# Altium PCB ESP32RobotBoard.PcbDoc
Units mm, origin at the board's own origin, x right, y up, seen from the top; angles counter-clockwise.
Board outline 64.99 x 56 mm, 2 copper layers (Top Layer, Bottom Layer), stack 1.554 mm thick; 31 components, 40 nets, 187 pads, 207 vias.
Unrouted connection lines stored in the file: 38.
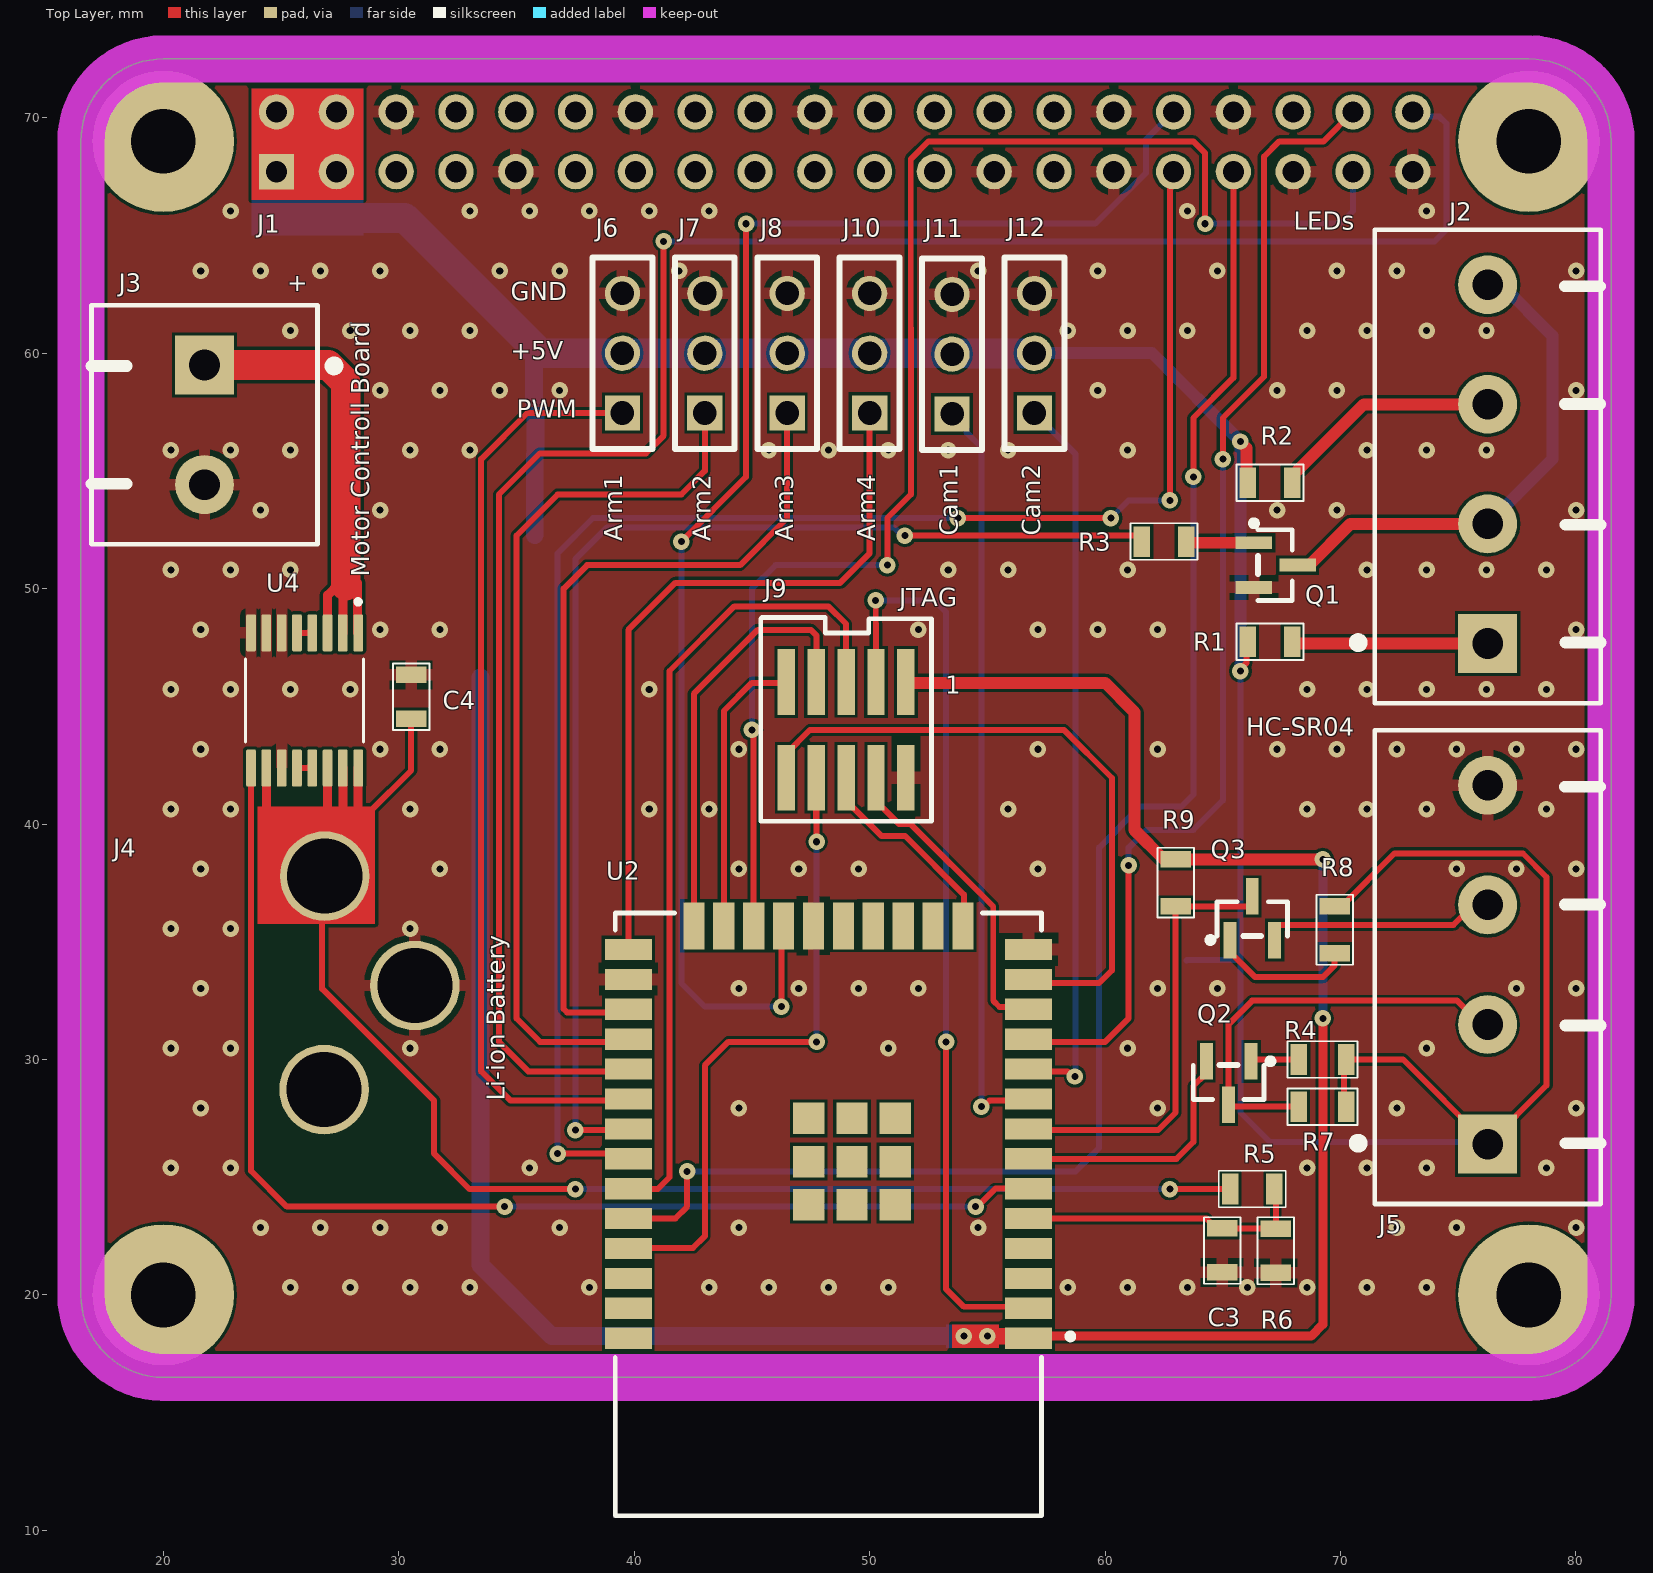
[diagram p0: Top Layer view]
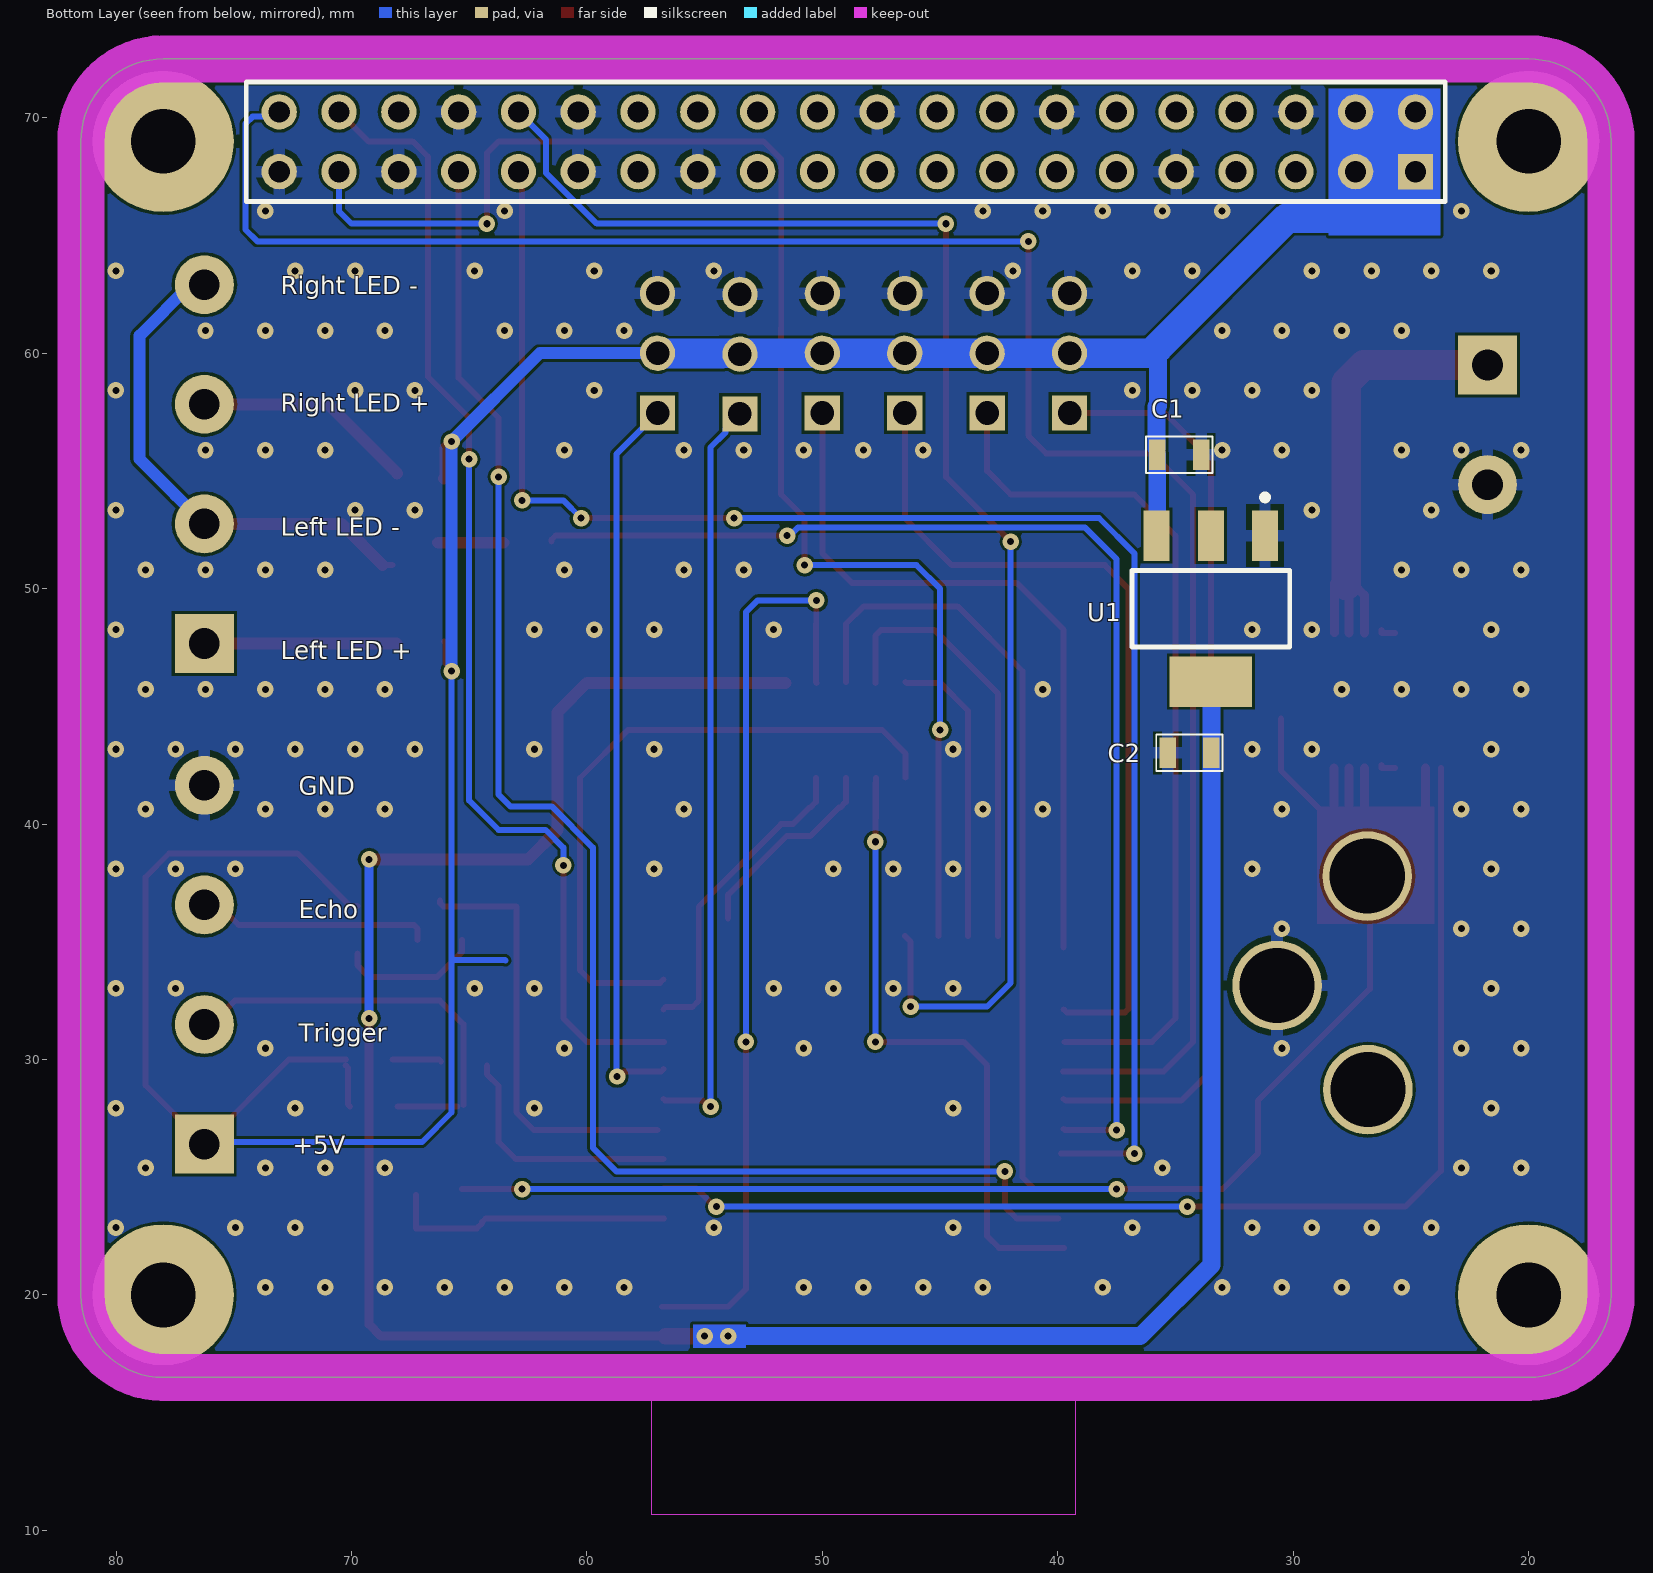
[diagram p1: Bottom Layer view, seen from below]

## Layer stack, top to bottom
Top Solder: solder mask 0.0203, Solder Resist, Dk 3.5
Top Layer: signal copper 0.0533
Dielectric 1: dielectric 1.4478, FR-4, Dk 4.6
Bottom Layer: signal copper 0.0533
Bottom Solder: solder mask 0.0203, Solder Resist, Dk 3.5

## Board outline
16.5,20 ccw(c20,20) 20,16.5 78,16.5 ccw(c77.996,19.996) 81.492,20 81.492,69 ccw(c77.996,69.004) 78,72.5 20,72.5 ccw(c20,69) 16.5,69

## Design rules (kind name [scope] priority, off if disabled: settings)
Clearance [All] p1: gap=0.127 ignorepadtopadclearanceinfootprint=FALSE except(0: Arc-Hole Track-Hole SMDPad-Hole THPad-Hole Via-Hole Fill-Hole Poly-Hole Region-Hole Text-Hole)
HoleSize [All] p1: absolutevalues=TRUE maxlimit=5.54 minlimit=0.025 maxpercent=80.000 minpercent=20.000
PolygonConnect [All] p1: connectstyle=Relief reliefconductorwidth=0.508 reliefentries=4 polygonreliefangle="90 Angle" airgapwidth=0.254
RoutingVias [All] p1: holewidth=0.3 width=0.7 viastyle="Through Hole" minholewidth=0.3 minwidth=0.635 maxholewidth=0.711 maxwidth=1.27
SolderMaskExpansion [All] p1: expansion=0.102 istentingtop=FALSE
Width [All] p1: maxlimit=1.27 minlimit=0.254 preferedwidth=0.254 minimp=50.000000 maximp=50.000000 favimp=50.000000
29 further rules are at their usual default settings.

## Components (designator, comment, footprint, x,y, rotation, side; value= is the part's Value field where it differs from the comment)
C1 "100n" C0805 34.75,55.717 r180 bottom
C2 "10u" C0805 34.5,43 r0 bottom
C3 "10n" C0805 65,21.802 r270 top
C4 "100n" C0805 30.5,45.5 r90 top
J1 "RPI GPIO Connector" rpi 48.94,68.98 r180 top
J2 "BUCHSEHN_1X4" MKDSN2,5/4-5,08 76.25,50.21 r90 top value="1X4 female"
J3 "2X1Molex" MKDSN2,5/2-5,08 21.75,56.96 r270 top value="CII 5.08/2"
J4 "CONN_DC10A" DC10A 26.75,33.5 r270 top value=DC10A
J5 "BUCHSEHN_1X4" MKDSN2,5/4-5,08 76.25,28.947 r90 top value="1X4 female"
J6 "BUCHSEHN_1X3" "HEADER_3X1 - male" 39.5,60 r90 top value="1X3 male"
J7 "BUCHSEHN_1X3" "HEADER_3X1 - male" 43,60 r90 top value="1X3 male"
J8 "BUCHSEHN_1X3" "HEADER_3X1 - male" 46.5,60 r90 top value="1X3 male"
J9 "esp-debug-connector" SAMTEC-FTS-105-01-X-DV 49,44 r180 top
J10 "BUCHSEHN_1X3" "HEADER_3X1 - male" 50,60 r90 top value="1X3 male"
J11 "BUCHSEHN_1X3" "HEADER_3X1 - male" 53.5,59.96 r90 top value="1X3 male"
J12 "BUCHSEHN_1X3" "HEADER_3X1 - male" 57,60 r90 top value="1X3 male"
Q1 "NPN" SOT23-3 67.25,51 r0 top
Q2 "BC847C_SOT23" SOT23-3 65.25,29 r270 top value=BC847C
Q3 "BC847C_SOT23" SOT23-3 66.25,36 r90 top value=BC847C
R1 "300R" R0805#1 67,47.75 r180 top
R2 "300R" R0805#1 67,54.5 r180 top
R3 "1k" R0805#1 62.5,52 r0 top
R4 "10k" R0805#2 69.25,30 r0 top
R5 "24k" R0805#1 66.25,24.5 r180 top
R6 "7k5" R0805#1 67.25,21.878 r90 top
R7 "10k" R0805#2 69.25,28 r0 top
R8 "10k" R0805#2 69.75,35.5 r270 top
R9 "10k" R0805#2 63,37.5 r270 top
U1 "LM1117" SOT223 31.2,52.25 r0 bottom value=LM1117-ADJ
U2 "ESP32-DEVKITC-32D" Espressif_Systems_ESP32-WROOM-32D_MFG 48.25,23.425 r180 top
U4 "INA250A3PW" TSSOP-16 26,45.25 r270 top

## Footprints (in the part's own frame and the unit in brackets; to place one, negate y for a bottom-side part, rotate by r counter-clockwise, add the part's x,y. Pads: shape width x height; smd on the part's side, far side on the other; paste and mask are expansions set on the pad)
C0805 [mm] "Chip Capacitor, Body 2.0x1.3mm, IPC High Density"
  rect 0.7x1.3 smd: 1(-1.025,-0.025) 2(0.838,-0.025)
  silkscreen extent -1.5,-0.8 1.32,0.75, body extent -1.1,-0.64 0.9,0.61, height 0.8
DC10A [mm] "DC power connector"
  round 3.8 hole 3.2: 1(-4.293,0.102) 2(0.356,3.937) 3(4.775,0.076)
  body extent -4.14,-10.01 5.16,4.39, height 11.01
Espressif_Systems_ESP32-WROOM-32D_MFG [mm]
  rect 2x0.9 smd paste+0 mask+0: 1(-8.5,5.26) 2(-8.5,3.99) 3(-8.5,2.72) 4(-8.5,1.45) 5(-8.5,0.18) 6(-8.5,-1.09) 7(-8.5,-2.36) 8(-8.5,-3.63) 9(-8.5,-4.9) 10(-8.5,-6.17) 11(-8.5,-7.44) 12(-8.5,-8.71) 13(-8.5,-9.98) 14(-8.5,-11.25) 25(8.5,-11.25) 26(8.5,-9.98) 27(8.5,-8.71) 28(8.5,-7.44) 29(8.5,-6.17) 30(8.5,-4.9) 31(8.5,-3.63) 32(8.5,-2.36) 33(8.5,-1.09) 34(8.5,0.18) 35(8.5,1.45) 36(8.5,2.72) 37(8.5,3.99) 38(8.5,5.26)
  rect 0.9x2 smd paste+0 mask+0: 15(-5.715,-12.25) 16(-4.445,-12.25) 17(-3.175,-12.25) 18(-1.905,-12.25) 19(-0.635,-12.25) 20(0.635,-12.25) 21(1.905,-12.25) 22(3.175,-12.25) 23(4.445,-12.25) 24(5.715,-12.25)
  rect 1.33x1.33 smd paste+0 mask+0: 39(-2.835,-0.405) 39(-2.835,-4.075) 39(-2.835,-2.24) 39(-1,-0.405) 39(-1,-2.24) 39(-1,-4.075) 39(0.835,-0.405) 39(0.835,-2.24) 39(0.835,-4.075)
  Keep-Out Layer region: -9,6.45 9,6.45 9,12.75 -9,12.75
  Keep-Out Layer region: -9,6.45 9,6.45 9,12.75 -9,12.75
  silkscreen extent -10.4,-12.8 9.05,12.8, body extent -9.6,-13.35 9.6,12.9, height 0.25
"HEADER_3X1 - male" [mm] "MOLEX_male"
  rect 1.5x1.5 hole 1: 1(-2.54,0)
  round 1.5 hole 1: 2(0,0) 3(2.54,0)
  silkscreen extent -4.06,-1.27 4.06,1.27, body extent -4.06,-1.17 4.06,1.18, height 9.5
MKDSN2,5/2-5,08 [mm] "2-pole 5.08mm pitch Terminal Block"
  rect 2.5x2.5 hole 1.3: 1(-2.54,0)
  round 2.5 hole 1.3: 2(2.54,0)
  silkscreen extent -5.08,-4.8 5.08,5.7, body extent -5.62,-4.72 5.11,4.78, height 15
MKDSN2,5/4-5,08 [mm] "2-pole 5.08mm pitch Terminal Block"
  rect 2.5x2.5 hole 1.3: 1(-2.54,0)
  round 2.5 hole 1.3: 2(2.54,0) 3(7.62,0) 4(12.7,0)
  silkscreen extent -5.08,-4.8 15.04,5.7, body extent -5.64,-4.8 15.17,4.72, height 15
R0805#1 [mm] "Chip Resistor, Body 2.0x1.2mm, IPC Medium Density"
  rect 0.7x1.3 smd: 1(-0.94,0) 2(0.94,0)
  silkscreen extent -1.42,-0.77 1.42,0.77, body extent -1,-0.62 1,0.63, height 0.5
R0805#2 [mm] "Chip Resistor, Body 2.0x1.2mm, IPC Medium Density"
  rect 0.7x1.3 smd: 1(-1.016,0) 2(0.991,0)
  silkscreen extent -1.5,-0.77 1.47,0.77, body extent -1,-0.62 1,0.63, height 0.5
rpi [mm]
  rect 1.5x1.5 hole 0.9: 1(24.13,1.27)
  round 1.5 hole 0.9: 2(24.13,-1.27) 3(21.59,1.27) 4(21.59,-1.27) 5(19.05,1.27) 6(19.05,-1.27) 7(16.51,1.27) 8(16.51,-1.27) 9(13.97,1.27) 10(13.97,-1.27) 11(11.43,1.27) 12(11.43,-1.27) 13(8.89,1.27) 14(8.89,-1.27) 15(6.35,1.27) 16(6.35,-1.27) 17(3.81,1.27) 18(3.81,-1.27) 19(1.27,1.27) 20(1.27,-1.27) 21(-1.27,1.27) 22(-1.27,-1.27) 23(-3.81,1.27) 24(-3.81,-1.27) 25(-6.35,1.27) 26(-6.35,-1.27) 27(-8.89,1.27) 28(-8.89,-1.27) 29(-11.43,1.27) 30(-11.43,-1.27) 31(-13.97,1.27) 32(-13.97,-1.27) 33(-16.51,1.27) 34(-16.51,-1.27) 35(-19.05,1.27) 36(-19.05,-1.27) 37(-21.59,1.27) 38(-21.59,-1.27) 39(-24.13,1.27) 40(-24.13,-1.27)
  body extent -25.52,-2.63 25.53,2.38, height 8.5
SAMTEC-FTS-105-01-X-DV [mm]
  rect 0.74x2.79 smd mask+0: 1(-2.54,-2.032) 2(-2.54,2.032) 3(-1.27,-2.032) 4(-1.27,2.032) 5(0,-2.032) 6(0,2.032) 7(1.27,-2.032) 8(1.27,2.032) 9(2.54,-2.032) 10(2.54,2.032)
  silkscreen extent -3.62,-4.78 3.62,3.88, body extent -3.18,-2.92 3.17,2.92, height 4.33
SOT23-3 [mm] "SOT23, 3-Leads, Body 3.0x2.6mm (max), Pitch 0.95mm, IPC Medium Density"
  rect 1.55x0.55 smd: 1(-0.925,0.95) 2(-0.925,-0.95) 3(0.925,0)
  silkscreen extent -1.05,-1.5 0.7,1.9, body extent -1.53,-1.5 1.47,1.5, height 1.3
SOT223 [mm] "SOT-223/SC-73; 4 Leads; Body 6.7 x 7.3 mm, inc. leads (LxW max)"
  rect 1.1x2.15 smd: 1(0,0) 2(2.3,0) 3(4.6,0)
  rect 3.5x2.15 smd: 4(2.3,6.2)
  silkscreen extent -1.05,-1.75 5.65,4.72, body extent -0.94,-0.53 5.56,6.47, height 1.7
TSSOP-16 [mm]
  rrect25% 1.57x0.41 smd: 1(-2.87,2.275) 2(-2.87,1.625) 3(-2.87,0.975) 4(-2.87,0.325) 5(-2.87,-0.325) 6(-2.87,-0.975) 7(-2.87,-1.625) 8(-2.87,-2.275) 9(2.87,-2.275) 10(2.87,-1.625) 11(2.87,-0.975) 12(2.87,-0.325) 13(2.87,0.325) 14(2.87,0.975) 15(2.87,1.625) 16(2.87,2.275)
  silkscreen extent -4.29,-2.5 1.77,2.5, body extent -3.15,-2.5 3.25,2.5, height 1.06

## Part data
C1 C4: library part Cap100n_50V_0805, "Ceramic Chip Capacitor 0805 size", Manufacturer="NIC COMPONENTS", Package=0805, Voltage=50V, Distributor=RET, OrderCode=93-02-37, Price=4
C2: library part Cap10u_10V_0805, "Ceramic Chip Capacitor 0805 size", Manufacturer=NIC, Package=0805, Voltage=10V, Distributor=RET, OrderCode=93-04-42, Price=9
C3: library part Cap10n_50V_0805, "Ceramic Chip Capacitor 0805 size", Manufacturer="NIC COMPONENTS", Package=0805, Voltage=50V, Distributor=RET, OrderCode=93-02-32, Price=4
J1: library part "rpi connector", "GPIO Header for Raspberry Pi A+/B+/Pi 2/Pi 3 - 2x20", Manufacturer="SparkFun Electronics", Manufacturer Part Number=PRT-14017, Supplier Part Number 1=1568-1462-ND, Accessory Type=Connector, Category="Development Boards, Kits, Programmers", ComponentLink1Description=https://cdn.sparkfun.com/datasheets/Dev/RaspberryPi/12313.pdf, ComponentLink1URL=https://cdn.sparkfun.com/datasheets/Dev/RaspberryPi/12313.pdf, For Use With/Related Products="Raspberry Pi", Nils Minor=author, nilsminor@web.de=mail, Part Status=Active, Pricing 1="1=1.84 (EUR)", RoHS="RoHS Compliant", Stock 1=150, Supplier 1=Digi-Key
J2 J5: "1X4_HEADER", Manufacturer=E-TEC, Distributor=RET, OrderCode=53-19-93, Price=82
J3: Manufacturer=STELVIO, Distributor=RET, OrderCode=53-08-03, Price=64
J4: "DC 10A connector", Manufacturer=CLIFF, Distributor=RET, OrderCode=53-10-45, Price=200
J6 J7 J8 J10 J11 J12: "1X3_HEADER", Manufacturer=E-TEC, Distributor=RET, OrderCode=53-00-05, Price=82
J9: Part number=53-04-57, Price=1000
Q1: "NPN small-signal 100mA 45V 250mW SOT-23", Manufacturer="ON Semi", PartNumber=BC847B, Serpa=032-00169
Q2 Q3: "NPN Bipolar transistor 100mA 45V UCE", Manufacturer=NXP, Package=SOT23, Distributor=RET, OrderCode=44-01-75
R1 R2: library part Res300R_125mW_0805, "Chip Resistor Thick Film", Manufacturer=YAGEO, Package=0805, Power=125mW, Distributor=RET, OrderCode=96-01-94, Price=1,8
R3: library part Res1k_125mW_0805, "Chip Resistor Thick Film", Manufacturer=YAGEO, Package=0805, Power=125mW, Distributor=RET, OrderCode=96-02-06, Price=2
R4 R7 R8 R9: library part Res10k_125mW_0805, "Chip Resistor Thick Film", Manufacturer=YAGEO, Package=0805, Power=125mW, Distributor=RET, OrderCode=96-02-32, Price=1,8
R5: library part Res24k_125mW_0805, "Chip Resistor Thick Film", Manufacturer=YAGEO, Package=0805, Power=125mW, Distributor=RET, OrderCode=96-02-34, Price=2
R6: library part Res7k5_125mW_0805, "Chip Resistor Thick Film", Manufacturer=YAGEO, Package=0805, Power=125mW, Distributor=RET, OrderCode=96-02-56, Price=1,8
U1: library part LM1117-ADJ, "15V 800mA adjustable LDO SOT-223", Manufacturer="National Semiconductor", Package=SOT223, Distributor=RET, OrderCode=76-00-51, Price=320
U2: "EVAL BOARD FOR ESP-WROOM-32", Package=None, Availability=Warning, Check_prices=https://www.snapeda.com/parts/ESP32-DEVKITC-32D/Espressif%20Systems/view-part/2777395/?ref=eda, MF="Espressif Systems", MP=ESP32-DEVKITC-32D, Price=None, Purchase-URL=https://pricing.snapeda.com/search/part/ESP32-DEVKITC-32D/?ref=eda, SnapEDA_Link=https://www.snapeda.com/parts/ESP32-DEVKITC-32D/Espressif%20Systems/view-part/2777395/?ref=snap
U4: "36V, bi-directional, precision current sense amplifier w/int. shunt resistor 16-TSSOP -40 to 125", Package="TSSOP-16 Texas Instruments", Availability=Warning, MF="Texas Instruments", Mouser-Purchase-URL=https://snapeda.com/shop?store=Mouser&id=835597, MP=INA250A3PW, Price=None, SnapEDA_Link=https://www.snapeda.com/parts/INA250A3PW/Texas%20Instruments/view-part/835597/?ref=snap, Texas_Instruments-Purchase-URL=https://snapeda.com/shop?store=Texas+Instruments&id=835597

## Free pads (board coordinates)
  round 6 hole 2.75: ""(20,20) ""(20,69) ""(78,20) ""(78,69)

## Via types
v1: diameter 0.7, hole 0.3, Top Layer to Bottom Layer, tented both sides, 206 vias
v2: diameter 0.7/0.7 (per signal layer), hole 0.3, Top Layer to Bottom Layer, tented both sides, 1 vias

## Nets (pads, with @x,y where several pads share a name; then routed paths per layer and width w, separated by ;. In a path a pad name is that pad's centre, name@x,y a point inside that pad or via, vN(x,y) a via of type N, cw(c..) or ccw(c..) an arc to the next point about the centre after c; other vN are vias at no path point)
+3V3: C2.1 J9.1 R9.1 U1.2 U1.4 U2.1 | length 105.7
  Top Layer w0.254: J9.1 J9.1@51.572,46 ; v1(54,18.25) v1(55,18.25) ; U2.1@56.665,18.25 U2.1
  Top Layer w0.381: U2.1@56.781,18.25 68.75,18.25 69.25,18.75 v1(69.25,31.75)
  Top Layer w0.508: J9.1@51.572,46 60,46 61.25,44.75 61.25,39.75 62.5,38.5 v2(69.25,38.5)
  Top Layer w0.712: v1(55,18.25) U2.1@56.665,18.25
  Bottom Layer w0.381: v1(69.25,31.75) v2(69.25,38.5)
  Bottom Layer w0.762: U1.4@33.475,46.225 C2.1 33.475,21.275 36.5,18.25 v1(54,18.25)
+5V: C1.1 J1.1 J1.2 J1.3 J1.4 J5.1 J6.2 J7.2 J8.2 J10.2 J11.2 J12.2 R1.2 R2.2 R4.2 R7.2 R8.1 U1.3 | length 131.4
  Top Layer w0.254: v1(65.75,46.5) 65.75,46.589 66,46.839 66,47.69 R1.2 ; R8.1 70.05,36.516 72.284,38.75 77.75,38.75 78.75,37.75 78.75,28.907 J5.1 J5.1@76.25,26.25 ; R7.2@70.057,28 70.149,28.092 70.149,29.649 R4.2@70.25,29.75 ; R4.2 72.657,30 76.157,26.5 J5.1@76.25,26.5
  Top Layer w0.508: v1(65.75,56.25) 65.75,56.216 66,55.966 66,54.75 R2.2@66.063,54.687
  Bottom Layer w0.254: 26.25,66.5 27,66.5 ; 35.75,57.75 35.775,57.725 ; U1.3@35.775,52.275 U1.3 ; 54.25,60 54.27,59.98 ; 63.454,34.204 63.475,34.225 65.725,34.225 65.75,34.25 ; v1(65.75,46.5) 65.75,34.25 ; J5.1@76.25,26.5 67,26.5 65.75,27.75 65.75,34.25
  Bottom Layer w0.508: J12.2@57.651,60 62,60 v1(65.75,56.25) v1(65.75,46.5)
  Bottom Layer w0.762: 35.75,57.75 35.75,60.25 ; U1.3@35.775,52.275 C1.1 ; C1.1@35.806,55.961 35.806,57.728
  Bottom Layer w1.27: 26.125,68.25 27.414,66.961 27.414,66.201 27.865,65.75 30.25,65.75 35.75,60.25 36,60 43.644,60 43.75,60 54.25,60 ; J1.3@26.924,67.824 J1.3@27.194,67.554 ; J1.3@27.35,68.25 27.725,68.25 J1.3@27.725,67.554 ; 54.27,59.98 J12.2@57,59.98
+12.6V_VIN: C4.1 J4.1 R5.2 U4.10 U4.14 U4.15 U4.16 | length 64.4
  Top Layer w0.254: 24.375,40.625 24.5,40.5 24.5,40.25 ; J4.1@26.75,37.75 26.75,33 31.5,28.25 31.5,26 33,24.5 v1(37.5,24.5) ; J4.1@27,38.75 26.975,38.775 26.975,39.525 J4.1@27,39.5 ; J4.1@27.5,38.75 J4.1@27.625,38.875 ; U4.15 U4.15@27.703,42.302 ; 28.25,40.25 28.275,40.275 ; 28.75,40.5 30.525,42.275 C4.1 ; v1@63,24.5 R5.2
  Top Layer w0.381: 24.375,40.625 U4.10 ; J4.1@26.975,39.525 U4.14 ; J4.1@27.625,38.875 U4.15 ; 28.275,40.275 U4.16
  Bottom Layer w0.254: v1(37.5,24.5) 53.354,24.5 v1(62.75,24.5)
+12.6V_VOUT: J3.1 U4.1 U4.2 U4.3 | length 21
  Top Layer w0.254: 27.625,49.875 27.75,50 ; U4.1@28.25,48.145 U4.1
  Top Layer w0.381: U4.3 26.975,49.725 27.25,50 ; U4.2 27.625,49.875 ; U4.1@28.25,48.145 28.25,50.25
  Top Layer w1.27: J3.1 27.006,59.5 27.75,58.756 27.75,50.125
ArmPWM1: J6.1 U2.30 | length 39.6
  Top Layer w0.254: J6.1 35.46,57.46 33.5,55.5 33.5,29.5 34.75,28.25 39.675,28.25 U2.30
ArmPWM2: J7.1 U2.28 | length 37.2
  Top Layer w0.254: U2.28@39.723,30.75 36,30.75 35,31.75 35,52.25 36.75,54 42,54 43,55 J7.1
ArmPWM3: J8.1 U2.27 | length 35.9
  Top Layer w0.254: U2.27 39.615,32 37.149,32 37,32.149 37,50 38,51 44.5,51 46.5,53 J8.1
ArmPWM4: J10.1 U2.25 | length 31.1
  Top Layer w0.254: U2.25@39.75,34.75 39.75,48.25 41.75,50.25 48.75,50.25 50,51.5 J10.1@50,57.5
BattCurrent: U2.6 U4.9 | length 51
  Top Layer w0.254: U4.9 23.725,25.275 25.25,23.75 v1(34.5,23.75) ; v1(54.5,23.75) 54.572,23.75 54.786,23.964 ; 54.822,24 55.337,24.515 U2.6
  Bottom Layer w0.254: v1(34.5,23.75) v1(54.5,23.75)
BattVoltage: C3.1 R5.1 R6.2 U2.5 | length 12.1
  Top Layer w0.254: U2.5@56.719,23.25 64.303,23.25 64.452,23.101 64.452,23.05 64.675,22.827 C3.1 64.979,22.822 R6.2@67.178,22.822 ; R6.2 R5.1@67.25,24.25
CamPWM1: J11.1 U2.9 | length 32
  Top Layer w0.254: v1(54.75,28) 54.839,28 55.089,28.25 56.675,28.25 U2.9
  Bottom Layer w0.254: J11.1@53.5,57.25 53.67,57.25 54.123,56.797 54.123,56.627 54.75,56 v1(54.75,28)
CamPWM2: J12.1 U2.10 | length 30.7
  Top Layer w0.254: U2.10 56.845,29.5 58.397,29.5 58.618,29.279 v1(58.721,29.279)
  Bottom Layer w0.254: J12.1@57.25,57.21 58.75,55.71 58.75,29.308 v1(58.721,29.279)
Echo: Q3.3 R9.2 U2.8 | length 18.5
  Top Layer w0.254: U2.8@57,27 62.25,27 63,27.75 R9.2 66.102,36.509 66.25,36.657 Q3.3@66.25,36.75
EN: J9.3 U2.2 | length 41.8
  Top Layer w0.254: J9.3@50.25,46 50.26,46.01 50.26,49.49 v1(50.25,49.5) ; J9.3 50.27,48.52 ; v1(53.25,30.75) 53.25,20.25 54,19.5 U2.2@56.807,19.5
  Bottom Layer w0.254: v1(50.25,49.5) 52.75,49.5 53.25,49 v1(53.25,30.75)
GND: C1.2 C2.2 C3.2 C4.2 J1.6 J1.9 J1.14 J1.20 J1.25 J1.29 J1.30 J1.34 J1.35 J1.39 J3.2 J4.2 J5.4 J6.3 J7.3 J8.3 J9.2 J10.3 J11.3 J12.3 Q1.2 R6.1 U1.1 U2.14 U2.20 U2.26 U4.6 U4.7 U4.8 U4.11
  other v1: 25.4,20.32 27.94,20.32 30.48,20.32 33.02,20.32 38.1,20.32 43.18,20.32 45.72,20.32 48.26,20.32 50.8,20.32 58.42,20.32 60.96,20.32 63.5,20.32 66.04,20.32 68.58,20.32 71.12,20.32 73.66,20.32 24.13,22.86 26.67,22.86 29.21,22.86 31.75,22.86 36.83,22.86 44.45,22.86 54.61,22.86 72.39,22.86 74.93,22.86 80.01,22.86 20.32,25.4 22.86,25.4 35.56,25.4 68.58,25.4 71.12,25.4 73.66,25.4 78.74,25.4 21.59,27.94 44.45,27.94 62.23,27.94 72.39,27.94 80.01,27.94 20.32,30.48 22.86,30.48 30.48,30.48 50.8,30.48 60.96,30.48 73.66,30.48 21.59,33.02 44.45,33.02 46.99,33.02 49.53,33.02 52.07,33.02 62.23,33.02 64.77,33.02 77.47,33.02 80.01,33.02 20.32,35.56 22.86,35.56 30.48,35.56 21.59,38.1 31.75,38.1 44.45,38.1 46.99,38.1 49.53,38.1 57.15,38.1 74.93,38.1 77.47,38.1 80.01,38.1 20.32,40.64 22.86,40.64 30.48,40.64 40.64,40.64 43.18,40.64 55.88,40.64 68.58,40.64 71.12,40.64 73.66,40.64 78.74,40.64 21.59,43.18 29.21,43.18 31.75,43.18 44.45,43.18 57.15,43.18 62.23,43.18 67.31,43.18 69.85,43.18 72.39,43.18 74.93,43.18 77.47,43.18 80.01,43.18 20.32,45.72 22.86,45.72 25.4,45.72 27.94,45.72 40.64,45.72 68.58,45.72 71.12,45.72 73.66,45.72 76.2,45.72 78.74,45.72 21.59,48.26 29.21,48.26 31.75,48.26 52.07,48.26 57.15,48.26 59.69,48.26 62.23,48.26 80.01,48.26 20.32,50.8 22.86,50.8 25.4,50.8 53.34,50.8 55.88,50.8 60.96,50.8 71.12,50.8 73.66,50.8 76.2,50.8 78.74,50.8 24.13,53.34 29.21,53.34 67.31,53.34 69.85,53.34 80.01,53.34 20.32,55.88 22.86,55.88 25.4,55.88 30.48,55.88 33.02,55.88 45.72,55.88 48.26,55.88 50.8,55.88 53.34,55.88 55.88,55.88 60.96,55.88 71.12,55.88 73.66,55.88 76.2,55.88 29.21,58.42 31.75,58.42 34.29,58.42 36.83,58.42 59.69,58.42 67.31,58.42 69.85,58.42 80.01,58.42 25.4,60.96 27.94,60.96 30.48,60.96 33.02,60.96 58.42,60.96 60.96,60.96 63.5,60.96 68.58,60.96 71.12,60.96 73.66,60.96 76.2,60.96 21.59,63.5 24.13,63.5 26.67,63.5 29.21,63.5 34.29,63.5 36.83,63.5 41.91,63.5 54.61,63.5 59.69,63.5 64.77,63.5 69.85,63.5 72.39,63.5 80.01,63.5 22.86,66.04 33.02,66.04 35.56,66.04 38.1,66.04 40.64,66.04 43.18,66.04 63.5,66.04 73.66,66.04
IN1: J1.38 U2.11 | length 49.4
  Top Layer w0.254: U2.11@56.723,30.75 60,30.75 61,31.75 v1(61,38.25) ; v1(65,55.5) 65,57.25 66.75,59 66.75,68.351 67.399,69 69.28,69 J1.38
  Bottom Layer w0.254: v1(61,38.25) 61,39 61.75,39.75 63.75,39.75 65,41 v1(65,55.5)
IN2: J1.40 U2.29 | length 85.1
  Top Layer w0.254: U2.29@39.771,29.5 35.5,29.5 34.25,30.75 34.25,54 36,55.75 40.5,55.75 41.25,56.5 v1(41.25,64.75) ; J1.40@73,70.25 J1.40@73,70.32
  Bottom Layer w0.254: v1(41.25,64.75) 74,64.75 74.5,65.25 74.5,69.75 74.201,70.049 73.451,70.049 J1.40@73.25,70.25
IN3: J1.31 U2.32 | length 69.6
  Top Layer w0.254: v1(36.75,26) U2.32@39.866,26 ; v1(53.75,53) v1(60.25,53) ; v1(62.75,53.75) 62.75,67.55 J1.31
  Bottom Layer w0.254: v1(36.75,26) 36.75,51.5 38.25,53 v1(53.75,53) ; v1(60.25,53) 61,53.75 v1(62.75,53.75)
IN4: J1.33 U2.34 | length 66.8
  Top Layer w0.254: U2.34@39.96,23.25 41.75,23.25 42.25,23.75 v1(42.25,25.25) ; v1(63.75,54.75) 63.75,57.25 65.45,58.95 J1.33
  Bottom Layer w0.254: v1(42.25,25.25) 58.75,25.25 59.75,26.25 59.75,39 61.5,40.75 63.25,40.75 63.75,41.25 v1(63.75,54.75)
IOD: J9.5 U2.33 | length 34.8
  Top Layer w0.254: U2.33@39.836,24.5 41,24.5 41.5,25 41.5,46.5 44.25,49.25 48.25,49.25 49,48.5 J9.5
LEDPWM: R3.1 U2.31 | length 51.4
  Top Layer w0.254: v1(37.5,27) 39.695,27 U2.31 ; v1(51.5,52.25) 61.337,52.25 61.5,52.087 R3.1@61.5,52
  Bottom Layer w0.254: v1(37.5,27) 37.5,51.25 38.854,52.604 51.025,52.604 51.379,52.25 v1(51.5,52.25)
NetJ2_1: J2.1 R1.1 | length 8.3
  Top Layer w0.254: R1.1@68,47.75 R1.1@68.08,47.67
  Top Layer w0.508: R1.1@68.08,47.67 J2.1
NetJ2_2: J2.2 J2.4 Q1.3 | length 21.9
  Top Layer w0.254: Q1.3@68.25,51 Q1.3@68.675,51 ; J2.4@76,63 J2.4@76.25,62.75
  Top Layer w0.508: Q1.3@68.675,51 70.425,52.75 J2.2
  Bottom Layer w0.254: J2.4 J2.4@76.84,62.91
  Bottom Layer w0.508: J2.2 77.465,53.965 79,55.5 79,60.75 J2.4@76.84,62.91
NetJ2_3: J2.3 R2.1 | length 9.4
  Top Layer w0.254: J2.3@75.58,57.83 J2.3
  Top Layer w0.508: R2.1@68.059,54.896 70.993,57.83 J2.3@75.58,57.83
NetJ5_2: J5.2 Q2.3 R7.1 | length 17.8
  Top Layer w0.254: Q2.3 65.25,31.5 66.25,32.5 74.956,32.5 75.956,31.5 J5.2@76.25,31.5 ; Q2.3@65.5,28 R7.1@68.05,28
NetJ5_3: J5.3 Q3.2 | length 10.1
  Top Layer w0.254: Q3.2 67.2,35.575 67.348,35.723 74.798,35.723 75.825,36.75 J5.3@76.25,36.75 ; J5.3@76.183,36.5 J5.3
NetQ1_1: Q1.1 R3.2 | length 2.8
  Top Layer w0.254: R3.2@63.5,52 R3.2@63.55,51.95
  Top Layer w0.508: R3.2@63.55,51.95 Q1.1
NetQ2_1: Q2.1 R4.1 | length 2.1
  Top Layer w0.254: Q2.1 66.275,30 R4.1 R4.1@68.25,30
NetQ3_1: Q3.1 R8.2 | length 6.1
  Top Layer w0.254: Q3.1 65.3,34.575 66.375,33.5 69.25,33.5 69.75,34 R8.2@69.75,34.5
NetU4_4: U4.4 U4.5 | length 0.7
  Top Layer w0.254: U4.5 26.247,48.12 26.25,48.123 U4.4@26.25,48.25
NetU4_12: U4.12 U4.13 | length 0.7
  Top Layer w0.254: U4.12 26.247,42.38 26.25,42.383 U4.13@26.25,42.5
PWMA: J1.37 U2.22 | length 62.8
  Top Layer w0.254: v1(45,44) 45.075,43.925 U2.22@45.075,35.25 ; v1(50.75,51) 50.75,53 51.75,54 51.75,61.061 51.746,61.065 51.746,68.246 52.5,69 63.75,69 64.25,68.5 v1(64.25,65.5)
  Bottom Layer w0.254: v1(45,44) 45,50 46,51 v1(50.75,51) ; v1(64.25,65.5) 70,65.5 70.53,66.03 J1.37
PWMB: J1.32 U2.21 | length 62.1
  Top Layer w0.254: v1(42,52) 44.75,54.75 v1(44.75,65.5) ; v1(46.25,32.25) 46.25,35 U2.21@46.5,35.25
  Bottom Layer w0.254: v1(42,52) 42,33.25 43,32.25 v1(46.25,32.25) ; v1(44.75,65.5) 59.58,65.5 61.729,67.649 61.729,69.069 J1.32
RXD: J9.7 U2.24 | length 18.7
  Top Layer w0.254: U2.24@42.535,35.25 42.535,45.535 45.25,48.25 47.5,48.25 47.75,48 J9.7@47.75,46
TCK: J9.6 U2.15 | length 8.7
  Top Layer w0.254: J9.6 49,40.943 49.243,40.7 49.3,40.7 50.5,39.5 51.5,39.5 54,37 U2.15@54,36
TDI: J9.10 U2.13 | length 28.1
  Top Layer w0.254: J9.10 46.46,42.993 47.467,44 58.252,44 60.292,41.96 60.292,33.792 59.75,33.25 56.905,33.25 U2.13
TDO: J9.8 U2.35 | length 28.6
  Top Layer w0.254: U2.35@39.729,22 42.5,22 43,22.5 43,29.75 44,30.75 v1(47.75,30.75) ; 47.73,40.23 J9.8 ; v1(47.75,39.25) 47.74,39.26 47.74,41.74 J9.8@47.75,41.75
  Bottom Layer w0.254: v1(47.75,30.75) v1(47.75,39.25)
TMS: J9.4 U2.12 | length 13.5
  Top Layer w0.254: J9.4 50.27,40.943 50.513,40.7 50.55,40.7 51.25,40 51.75,40 55.25,36.5 55.25,32.5 55.518,32.232 56.653,32.232 U2.12
Trigger: Q2.2 U2.7 | length 10.8
  Top Layer w0.254: U2.7 63.035,25.785 63.75,26.5 63.75,28.875 64.25,29.375 Q2.2@64.25,29.75
TXD: J9.9 U2.23 | length 12.7
  Top Layer w0.254: U2.23@43.805,35.25 43.805,44.805 45,46 46.428,46 J9.9
pads on no net: J1.5 J1.7 J1.8 J1.10 J1.11 J1.12 J1.13 J1.15 J1.16 J1.17 J1.18 J1.19 J1.21 J1.22 J1.23 J1.24 J1.26 J1.27 J1.28 J1.36 J4.3 U2.3 U2.4 U2.16 U2.17 U2.18 U2.19 U2.36 U2.37 U2.38 U2.39

## Polygon pours and split planes (outlines as drawn)
GND on Top Layer "GND_L01_P000" (solid, remove dead copper, pour order 0): 16.5,72.5 81.5,72.5 81.5,16.5 16.5,16.5
GND on Bottom Layer "GND_L02_P003" (solid, remove dead copper, pour order 3): 16.5,72.5 81.5,72.5 81.5,16.5 16.5,16.5

## Keep-outs
Keep-Out Layer:
  lines w2: 16.5,69 cw(c20,69) 20,72.5 78,72.5 cw(c77.996,69.004) 81.492,69 81.492,20 cw(c77.996,19.996) 78,16.5 20,16.5 cw(c20,20) 16.5,20 16.5,69 ; 16.5,69 16.5,69

## Other copper
Top Layer:
  rectangle net +3V3: 53.5,17.75 55.5,18.75
  rectangle net +5V: 23.75,66.5 28.5,71.25
  rectangle net +12.6V_VIN: 24,35.75 29,40.75
Bottom Layer:
  rectangle net +3V3: 53.25,17.75 55.5,18.75
  rectangle net +5V: 23.75,65 28.5,71.25

## Silkscreen, mask and mechanical layers (free items; w line width, h text height)
Top Overlay:
  text "LEDs" at 68.004,65.254 h0.76
  text "+" at 25.254,62.627 h0.76
  text "GND" at 34.754,62.254 h0.76
  text "+5V" at 34.754,59.754 h0.76
  text "PWM" at 35.004,57.254 h0.76
  text "Cam1" at 53.746,52.254 h0.76 r90
  text "Cam2" at 57.246,52.254 h0.76 r90
  text "Arm1" at 39.496,52.004 h0.76 r90
  text "Arm2" at 43.246,52.004 h0.76 r90
  text "Arm3" at 46.746,52.004 h0.76 r90
  text "Arm4" at 50.246,52.004 h0.76 r90
  text "Motor Controll Board" at 28.746,50.504 h0.76 r90
  text "JTAG" at 51.254,49.254 h0.76
  text "HC-SR04" at 66.004,43.754 h0.76
  text "Li-ion Battery" at 34.492,28.254 h0.76 r90
Bottom Overlay:
  text "Right LED -" at 72.996,62.508 h0.76
  text "Right LED +" at 72.996,57.508 h0.76
  text "Left LED -" at 72.996,52.254 h0.76
  text "Left LED +" at 72.996,47.004 h0.76
  text "GND" at 72.246,41.254 h0.76
  text "Echo" at 72.246,36.004 h0.76
  text "Trigger" at 72.246,30.758 h0.76
  text "+5V" at 72.496,26.004 h0.76
M2: Outline:
  lines w0.254: 81.492,20 cw(c77.996,19.996) 78,16.5 20,16.5 cw(c20,20) 16.5,20 16.5,69 cw(c20,69) 20,72.5 78,72.5 cw(c77.996,69.004) 81.492,69

## Text inside footprints (layer, text, board x,y; h text height)
J9: Top Overlay "1" at 53.21,45.532 h0.76